# EAGLE board MMI_Addons_v1_panelized (EAGLE 6.1)
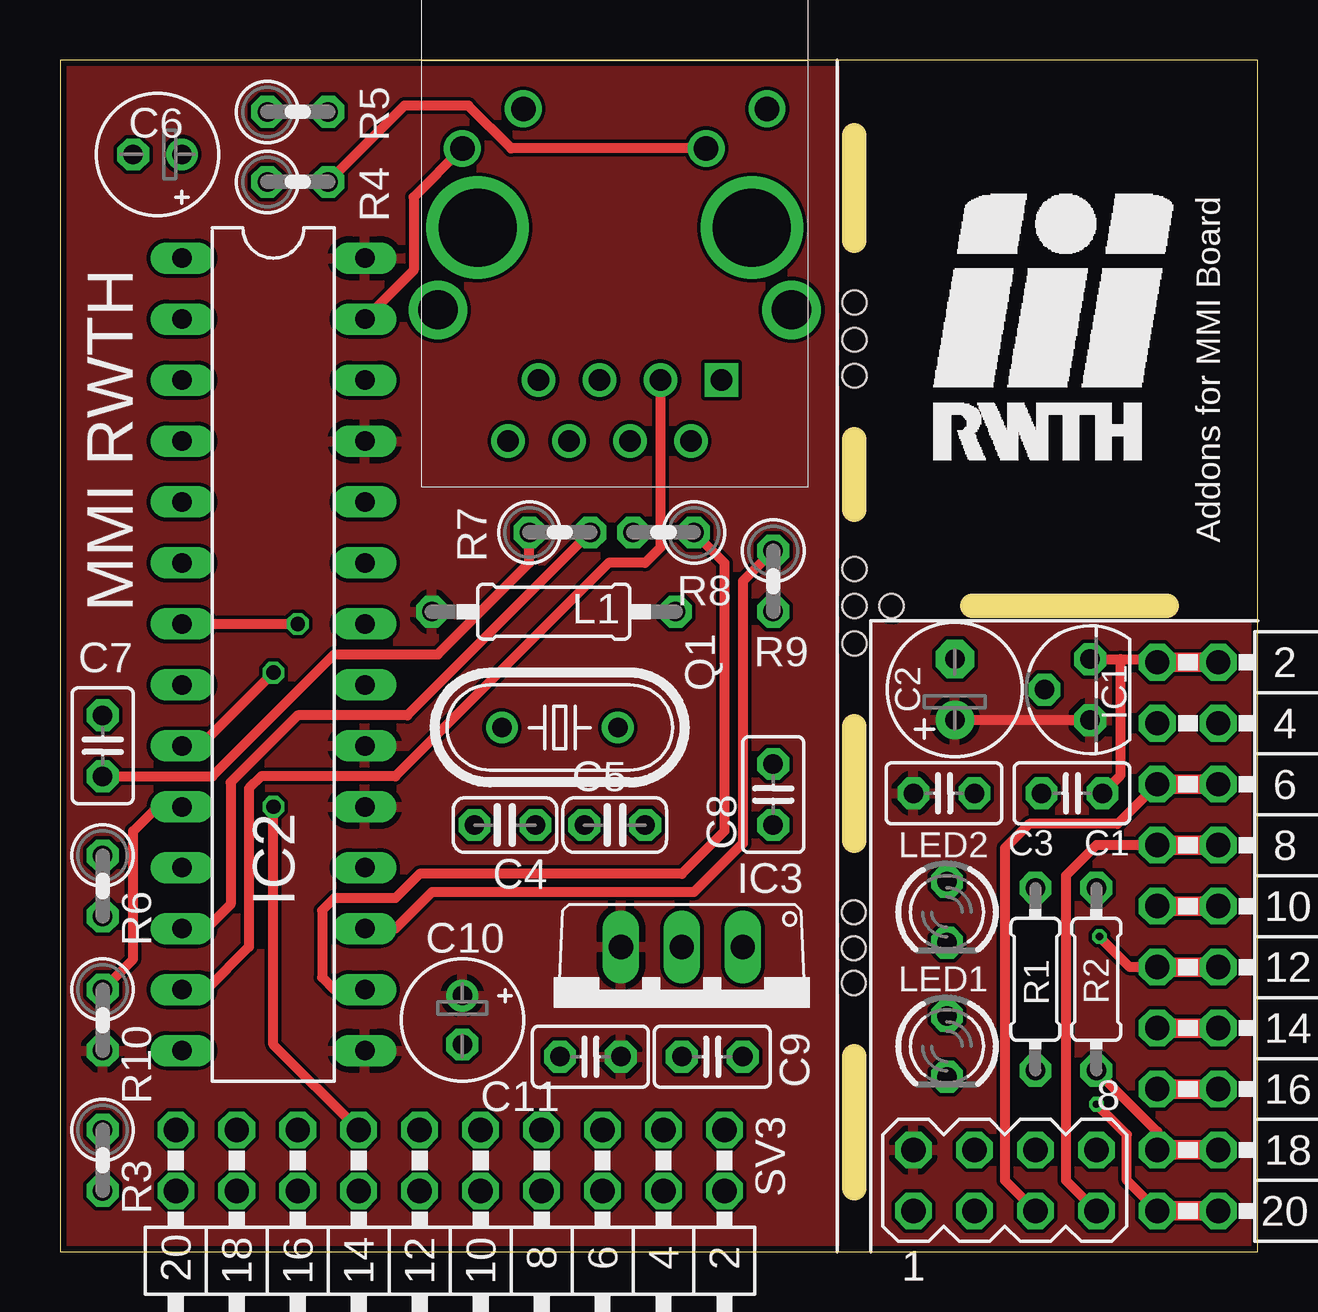
[diagram p0: board, top side]
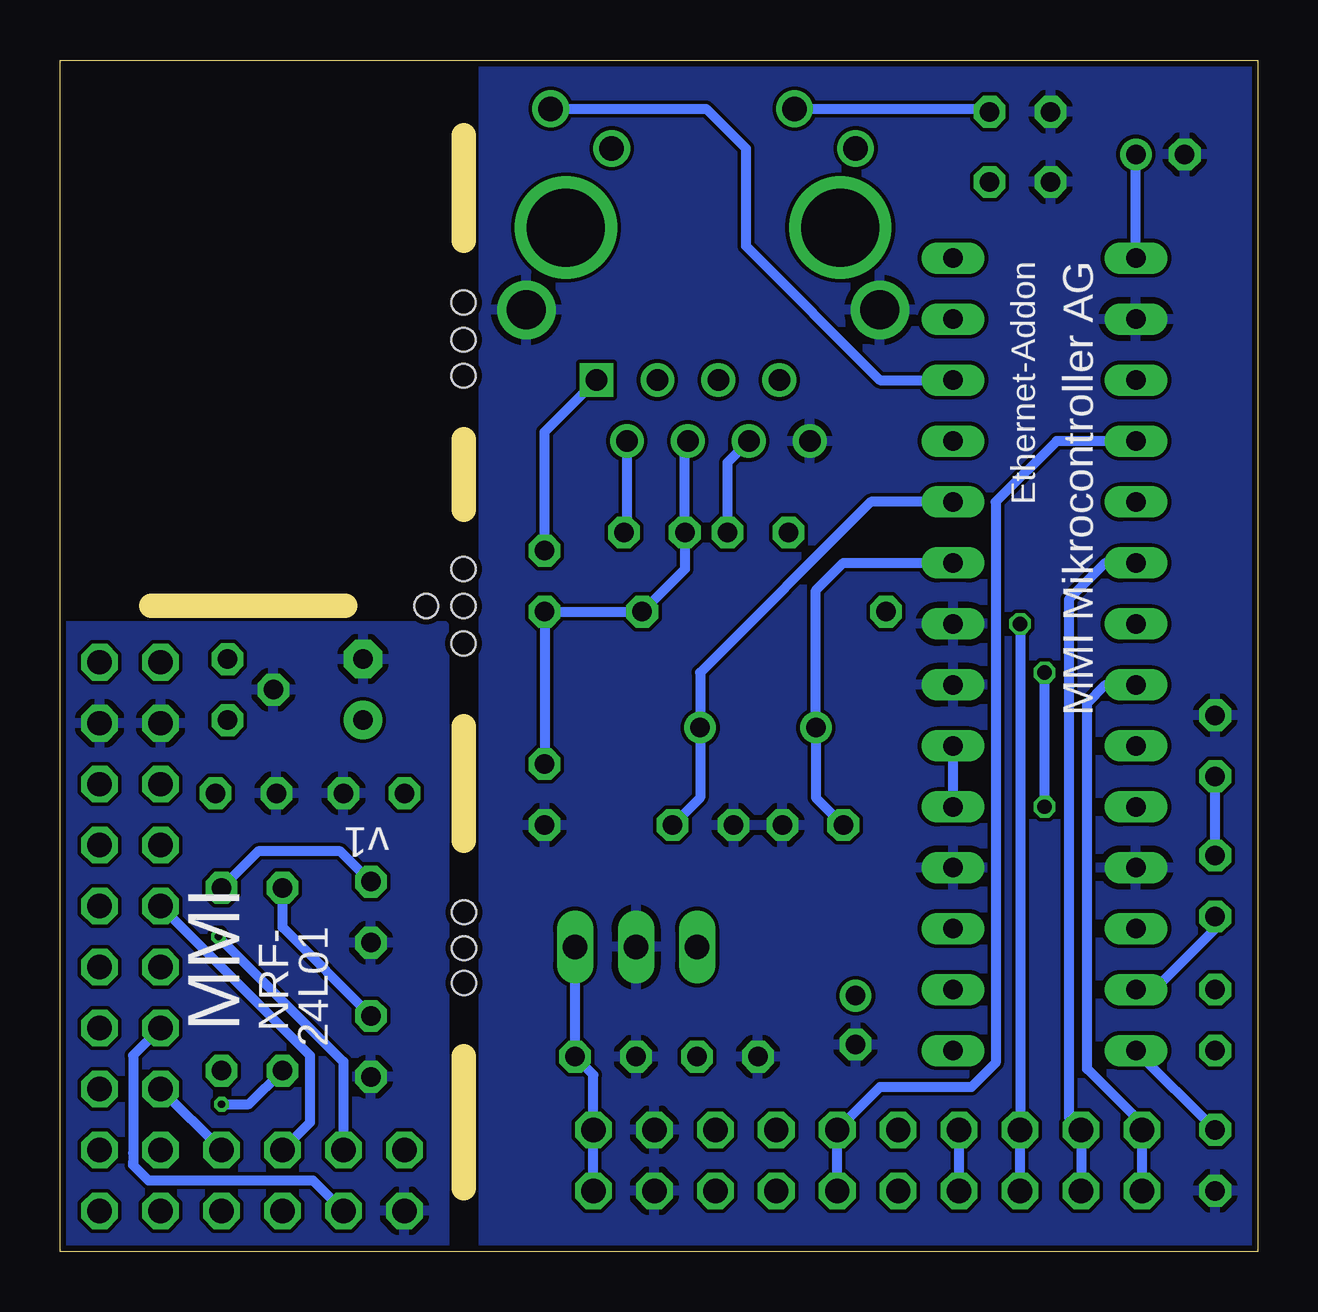
[diagram p1: board, bottom side, seen from below]

Size 49.91 x 49.66 mm. Coordinates in mm from the lower left corner, seen from the top.
Outline: 49.91,0 49.91,0
Outline: 49.91,0 49.91,26.21
Outline: 0.01,0 32.26,0 49.91,0
Outline: 0,0 0,49.66 49.91,49.66 49.91,0
Copper layers (1*16): Top 0.035mm / dielectric 1.5mm / Bottom 0.035mm
Design rules: minimum track width 6mil, minimum drill 12mil, track to track 6mil, track to pad 6mil, pad to pad 6mil, via to via 6mil, smd to smd 0mil, copper to edge 10mil, drill to drill 10mil, minimum pad ring 10mil, minimum via ring 6mil, stop-mask expansion 2mil, vias tented up to drill 100mil, thermal gap 10mil
Holes 1 mm at 33.1,26.9 33.1,39.55 33.1,38 33.1,36.5 34.65,26.9 33.1,28.45 33.1,25.35 33.07,14.15 33.07,12.65 33.07,11.2
Milling: 5 lines

## Footprints (pad centres in the part's own frame; a part is rotated, then mirrored left to right if it is on the bottom)
C025-025X050 = drill 0.813 octagon: 1 -1.27,0; 2 1.27,0
E2,5-6 = drill 0.813 pad 1.6: + -1.27,0 | drill 0.813 pad 1.6 octagon: - 1.27,0
C025-024X044 = drill 0.813 octagon: 1 -1.27,0; 2 1.27,0
E2-5 = drill 0.813 pad 1.27: + -1.016,0 | drill 0.813 pad 1.27 octagon: - 1.016,0
TO92 = drill 0.813 octagon: 1 -1.27,0; 2 0,1.905; 3 1.27,0
DIL28-3 = drill 0.813 long: 1 -16.51,-3.81; 2 -13.97,-3.81; 3 -11.43,-3.81; 4 -8.89,-3.81; 5 -6.35,-3.81; 6 -3.81,-3.81; 7 -1.27,-3.81; 8 1.27,-3.81; 9 3.81,-3.81; 10 6.35,-3.81; 11 8.89,-3.81; 12 11.43,-3.81; 13 13.97,-3.81; 14 16.51,-3.81; 15 16.51,3.81; 16 13.97,3.81; 17 11.43,3.81; 18 8.89,3.81; 19 6.35,3.81; 20 3.81,3.81; 21 1.27,3.81; 22 -1.27,3.81; 23 -3.81,3.81; 24 -6.35,3.81; 25 -8.89,3.81; 26 -11.43,3.81; 27 -13.97,3.81; 28 -16.51,3.81
TO220V = drill 1.016 long: 1 -2.54,-2.54; 2 0,-2.54; 3 2.54,-2.54
0207/10 = drill 0.813 octagon: 1 -5.08,0; 2 5.08,0
LED3MM = drill 0.813 octagon: A -1.27,0; K 1.27,0
HC49U-V = drill 0.813: 1 -2.413,0; 2 2.413,0
0204/7 = drill 0.813 octagon: 1 -3.81,0; 2 3.81,0
0207/2V = drill 0.813 octagon: 1 -1.27,0; 2 1.27,0
MA10-2W = drill 1.016 octagon: 1 -11.43,-1.27; 2 -11.43,1.27; 3 -8.89,-1.27; 4 -8.89,1.27; 5 -6.35,-1.27; 6 -6.35,1.27; 7 -3.81,-1.27; 8 -3.81,1.27; 9 -1.27,-1.27; 10 -1.27,1.27; 11 1.27,-1.27; 12 1.27,1.27; 13 3.81,-1.27; 14 3.81,1.27; 15 6.35,-1.27; 16 6.35,1.27; 17 8.89,-1.27; 18 8.89,1.27; 19 11.43,-1.27; 20 11.43,1.27
MA04-2 = drill 1.016 octagon: 1 -3.81,-1.27; 2 -3.81,1.27; 3 -1.27,-1.27; 4 -1.27,1.27; 5 1.27,-1.27; 6 1.27,1.27; 7 3.81,-1.27; 8 3.81,1.27
TRJ0011 = drill 0.9 square: 1 -4.445,6.35 | drill 0.9: 2 -3.175,8.89; 3 -1.905,6.35; 4 -0.635,8.89; 5 0.635,6.35; 6 1.905,8.89; 7 3.175,6.35; 8 4.445,8.89 | drill 1.63: GND1 -7.366,3.429; GND2 7.366,3.429 | drill 1.02: LED1.1 6.35,-3.302; LED1.2 3.81,-4.953; LED2.1 -3.81,-3.302; LED2.2 -6.35,-4.953 | drill 3.25: PC -5.715,0; PC21 5.715,0

## Placement (x,y rotation side)
C1  100n  [C025-025X050]  42.16,19.1 180 top
C2  100u  [E2,5-6]  37.29,23.43 90 top
C3  100n  [C025-025X050]  36.83,19.1 0 top
C4  22p  [C025-024X044]  18.54,17.78 180 top
C5  22p  [C025-024X044]  23.11,17.78 0 top
C6  10u  [E2-5]  4.06,45.72 180 top
C7  10n  [C025-025X050]  1.78,21.08 270 top
C8  10n  [C025-025X050]  29.72,19.05 90 top
C9  100n  [C025-025X050]  27.18,8.13 0 top
C10  10u  [E2-5]  16.76,9.65 270 top
C11  100n  [C025-025X050]  22.1,8.13 0 top
IC1  LP2950Z  [TO92]  42.93,23.42 90 top
IC2  ENC28J60SP  [DIL28-3]  8.89,24.89 270 top
IC3  LF 33 CV  [TO220V]  25.91,10.16 180 top
L1  10u  [0207/10]  20.57,26.67 0 top
LED1  [LED3MM]  36.96,8.56 270 top
LED2  [LED3MM]  36.96,14.15 270 top
Q1  25M  [HC49U-V]  20.83,21.84 180 top
R1  220  [0204/7]  40.64,11.35 270 top
R2  220  [0204/7]  43.18,11.35 270 top
R3  2.2k  [0207/2V]  1.78,3.81 270 top
R4  220  [0207/2V]  9.91,44.58 0 top
R5  220  [0207/2V]  9.91,47.5 0 top
R6  51  [0207/2V]  1.78,15.24 270 top
R7  51  [0207/2V]  20.83,29.97 0 top
R8  51  [0207/2V]  25.15,29.97 180 top
R9  51  [0207/2V]  29.72,27.94 270 top
R10  3.3k  [0207/2V]  1.78,9.65 270 top
SV1  [MA10-2W]  46.99,13.13 270 top
SV2  [MA04-2]  39.37,2.97 0 top
SV3  [MA10-2W]  16.26,3.81 180 top
U$1  TRJ0011  [TRJ0011]  23.11,42.67 180 top

## Library data of the parts
C1-C11 L1 R1-R10 = rcl
IC1 IC3 = linear
IC2 = microchip; MF: MICROCHIP; MPN: ENC28J60/SP; OC_FARNELL: 1084619; OC_NEWARK: 96K3661
LED1 LED2 = led
Q1 = crystal; OC_FARNELL: 1666969; OC_NEWARK: unknown
SV1-SV3 = con-lstb; OC_FARNELL: unknown; OC_NEWARK: unknown
U$1 = Ethernet2

## Nets
+3V1: C10.+ C11.2 IC2.15 IC2.19 IC2.20 IC2.25 IC2.28 IC3.3 L1.1 R10.2
+3V3: C2.+ C3.1 IC1.1 SV2.2
+5V: C9.2 IC3.1 SV3.1 SV3.2
GND: C1.2 C2.- C3.2 IC1.2 LED1.K LED2.K SV1.3 SV1.4 SV2.1
GND1: C4.1 C5.1 C6.- C7.1 C8.1 C9.1 C10.- C11.1 IC2.2 IC2.11 IC2.18 IC2.21 IC2.22 IC3.2 R3.2 R4.1 R5.1 SV3.3 SV3.4 U$1.8 U$1.GND1 U$1.GND2
N$1: LED1.A R1.1
N$2: LED2.A R2.1
N$3: SV1.5 SV1.6 SV2.5
N$4: SV1.7 SV1.8 SV2.7
N$5: SV1.9 SV1.10 SV2.6
N$6: SV1.11 SV1.12 SV2.4
N$7: SV1.13 SV1.14 SV2.3
N$8: SV1.15 SV1.16 SV2.8
N$9: R2.2 SV1.17 SV1.18
N$10: R1.2 SV1.19 SV1.20
N$11: IC2.27 U$1.LED1.1
N$12: IC2.26 U$1.LED2.2
N$13: IC2.17 R9.1 U$1.1
N$14: IC2.16 R8.1 U$1.2
N$15: IC2.13 R6.2 U$1.3
N$16: IC2.12 R7.2 U$1.6
N$17: IC2.14 R3.1
N$18: C4.2 IC2.23 Q1.2
N$19: C5.2 IC2.24 Q1.1
N$20: R4.2 U$1.LED2.1
N$21: R5.2 U$1.LED1.2
N$22: C6.+ IC2.1
N$23: C7.2 R6.1 R7.1
N$24: C8.2 L1.2 R8.2 R9.2 U$1.4
N$25: IC2.10 R10.1
N$26: IC2.8 SV3.19 SV3.20
N$27: IC2.6 SV3.17 SV3.18
N$28: IC2.7 SV3.15 SV3.16
N$29: IC2.9 SV3.13 SV3.14
N$30: IC2.4 SV3.9 SV3.10
VCC: C1.1 IC1.3 SV1.1 SV1.2

## Tracks (layer width: path | path; a pad name or v marks a point on that pad's centre or on a via)
+3V1
  Bottom 0.406: IC2.19 IC2.20
  pour Top: 0,0 0,49.53 32.26,49.53 32.26,0
+3V3
  Top 0.406: C2.+ 42.92,22.16 IC1.1
  pour Top: 49.78,26.09 33.91,26.09 33.91,0.18 49.78,0.18
+5V
  Bottom 0.406: SV3.2 SV3.1 27.69,7.37 C9.2 IC3.1
GND
  pour Bottom: 49.78,26.09 33.91,26.09 33.91,0.18 49.78,0.18
GND1
  pour Bottom: 32.26,0 32.26,49.53 0,49.53 0,0
N$1
  Bottom 0.406: LED1.A 40.64,13.51 R1.1
N$2
  Bottom 0.406: LED2.A 38.23,16.69 41.66,16.69 R2.1
N$3
  Top 0.406: SV1.5 44.07,17.83 40.39,17.83 39.37,16.82 39.37,5.89 39.37,2.97 SV2.5
  Top 0.813: SV1.5 SV1.6
N$4
  Top 0.406: SV1.7 43.18,16.94 41.91,15.67 41.91,2.97 SV2.7
  Top 0.813: SV1.7 SV1.8
N$5
  Top 0.813: SV1.9 SV1.10
  Bottom 0.406: SV1.9 40.64,9.32 39.5,8.18 39.5,5.39 SV2.6
N$6  (via drill 0.3)
  Top 0.406: SV1.11 44.58,11.86 v43.31,13.13
  Top 0.813: SV1.11 SV1.12
  Bottom 0.406: v43.31,13.13 38.1,7.93 SV2.4
N$7
  Top 0.813: SV1.14 SV1.13
  Bottom 0.406: SV1.13 46.86,8.18 46.86,4.12 46.86,3.73 46.86,3.61 46.23,2.97 39.37,2.97 SV2.3
N$8
  Top 0.813: SV1.15 SV1.16
  Bottom 0.406: SV1.15 SV2.8
N$9
  Top 0.406: SV1.17 45.72,5 R2.2
  Top 0.813: SV1.18 SV1.17
N$10  (via drill 0.3)
  Top 0.406: SV1.19 44.45,2.97 44.45,4.88 v43.18,6.15
  Top 0.813: SV1.19 SV1.20
  Bottom 0.406: v43.18,6.15 42.04,6.15 R1.2
N$11
  Top 0.406: U$1.LED1.1 14.73,43.94 14.73,40.89 IC2.27
N$12
  Bottom 0.406: U$1.LED2.2 22.99,47.63 21.34,45.97 21.34,41.91 15.75,36.32 IC2.26
N$13
  Top 0.406: R9.1 28.45,27.94 28.45,17.02 26.42,14.99 15.49,14.99 13.97,13.46 IC2.17
  Bottom 0.406: R9.1 29.72,34.16 U$1.1
N$14
  Top 0.406: R8.1 27.69,28.7 27.69,17.53 25.91,15.75 14.99,15.75 13.97,14.73 11.43,14.73 10.92,14.22 10.92,11.43 11.43,10.92 IC2.16
  Bottom 0.406: U$1.2 26.29,29.85 R8.1
N$15
  Top 0.406: U$1.3 25.02,29.34 24.38,28.7 22.86,28.7 15.75,21.59 14.73,20.57 13.97,19.81 8.38,19.81 7.87,19.3 7.87,12.7 6.1,10.92 IC2.13
  Bottom 0.406: R6.2 1.78,13.46 4.32,10.92 IC2.13
N$16
  Top 0.406: R7.2 14.48,22.35 9.91,22.35 7.11,19.56 7.11,14.48 6.1,13.46 IC2.12
  Bottom 0.406: R7.2 22.1,32.89 U$1.6
N$17
  Bottom 0.406: R3.1 IC2.14
N$18
  Bottom 0.406: C4.2 18.41,18.92 Q1.2 18.41,27.56 17.27,28.7 IC2.23
N$19
  Bottom 0.406: C5.2 23.24,18.92 Q1.1 23.24,24.13 16.13,31.24 IC2.24
N$20
  Top 0.406: U$1.LED2.1 18.8,45.97 17.02,47.75 14.35,47.75 R4.2
N$21
  Bottom 0.406: U$1.LED1.2 11.3,47.63 R5.2
N$22
  Bottom 0.406: IC2.1 C6.+
N$23
  Top 0.406: C7.2 6.35,19.81 11.43,24.89 15.75,24.89 19.56,28.7 R7.1
  Bottom 0.406: R6.1 C7.2
N$24
  Bottom 0.406: C8.2 R9.2 L1.2 23.88,28.45 R8.2 23.88,33.66 U$1.4
N$25
  Top 0.406: R10.1 3.05,12.19 3.05,17.53 4.06,18.54 IC2.10
N$26
  Bottom 0.406: SV3.20 SV3.19 4.83,5.33 7.11,7.62 7.11,22.86 6.35,23.62 IC2.8
N$27
  Bottom 0.406: SV3.18 SV3.17 7.87,5.59 7.87,27.18 6.35,28.7 IC2.6
N$28  (via drill 0.6)
  Top 0.406: IC2.7 v9.91,26.16
  Bottom 0.406: SV3.16 SV3.15 v9.91,26.16
N$29  (via drill 0.6)
  Top 0.406: SV3.13 8.89,8.64 v8.89,18.54 | v8.89,24.13 5.84,21.08 IC2.9
  Bottom 0.406: SV3.14 SV3.13 | v8.89,18.54 v8.89,24.13
N$30
  Bottom 0.406: SV3.10 SV3.9 15.75,6.86 11.94,6.86 10.92,7.87 10.92,31.24 8.38,33.78 IC2.4
VCC
  Top 0.406: IC1.3 44.2,24.69 | 44.2,24.69 45.59,24.69 SV1.1 | C1.1 44.2,19.86 44.2,24.69
  Top 0.813: SV1.1 SV1.2

## Text on the board
tPlace: Addons for MMI Board | MMI RWTH
bPlace: MMI Mikrocontroller AG | Ethernet-Addon | v1 | 24L01 | NRF- | MMI